# EAGLE board crystal-test-breakout (EAGLE 6.5.0)
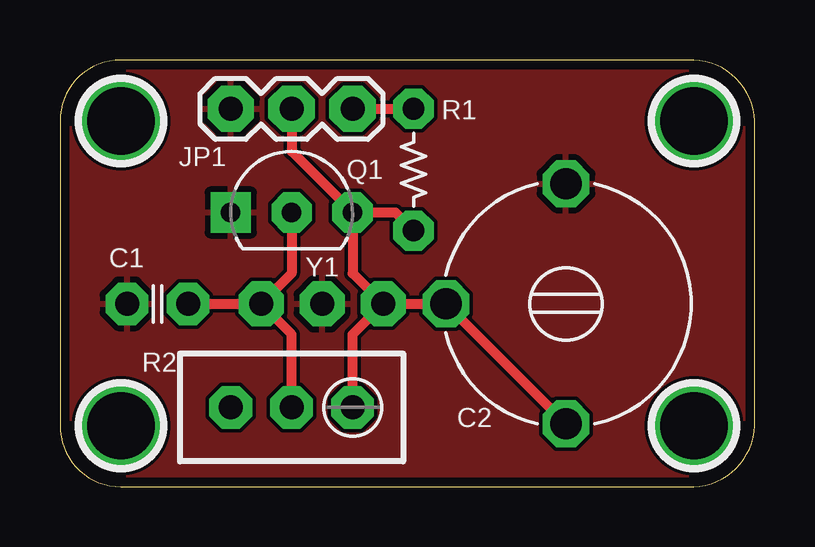
[diagram p0: board, top side]
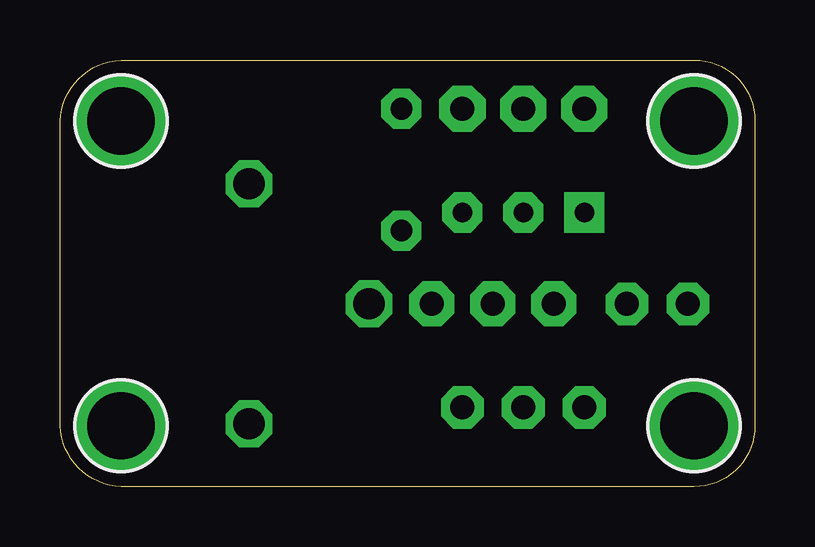
[diagram p1: board, bottom side, seen from below]

Size 28.96 x 17.78 mm. Coordinates in mm from the lower left corner, seen from the top.
Outline: 0,15.24 0,2.54 arc90 2.54,0 26.16,0 arc90 28.96,2.54 28.96,15.24 arc90 26.16,17.78 2.54,17.78 arc90 0,15.24
Copper layers (1*16): Top 0.0356mm / dielectric 1.5011mm / Bottom 0.0356mm
Design rules "LaenPCBOrder_2": minimum track width 6mil, minimum drill 13mil, track to track 6mil, track to pad 6mil, pad to pad 6mil, via to via 6mil, smd to smd 6mil, copper to edge 15mil, drill to drill 6mil, minimum pad ring 7mil, minimum via ring 7mil, stop-mask expansion 3mil, vias tented up to drill 20mil, thermal gap 10mil

## Footprints (pad centres in the part's own frame; a part is rotated, then mirrored left to right if it is on the bottom)
C025-025X050 = drill 1 pad 1.778 octagon: 1 -1.27,0; 2 1.27,0
GYC40000 = drill 1.3 octagon: P$1 -5,0; P$2 0,-5; P$3 5,0
HOLE-#2 = drill 2.8 pad 3.81: P$1 0,0
1X03 = drill 1 pad 1.93 octagon: 1 0,0; 2 2.54,0; 3 5.08,0
TO-92-AMMO = drill 0.813 pad 1.676 square: 1 -2.54,0 | drill 0.813 pad 1.676 octagon: 2 0,0; 3 2.54,0
RESISTOR-AXIAL-PTH-5.08MM = drill 0.9 pad 1.676 octagon: P$1 -2.54,0; P$2 2.54,0
RTRIM3296W = drill 1 pad 1.778 octagon: 1 -2.54,0; 2 0,0; 3 2.54,0
RESONATOR-PTH = drill 1 pad 1.88 octagon: 1 -2.54,0; 2 0,0; 3 2.54,0

## Placement (x,y rotation side)
C1  [C025-025X050]  4.06,7.62 180 top
C2  [GYC40000]  21.08,7.62 270 top
H1  HOLE#2  [HOLE-#2]  2.54,15.24 0 top
H2  HOLE#2  [HOLE-#2]  26.42,15.24 0 top
H3  HOLE#2  [HOLE-#2]  2.54,2.54 0 top
H4  HOLE#2  [HOLE-#2]  26.42,2.54 0 top
JP1  [1X03]  12.19,15.75 180 top
Q1  1N3904  [TO-92-AMMO]  9.65,11.43 0 top
R1  [RESISTOR-AXIAL-PTH-5.08MM]  14.73,13.21 90 top
R2  [RTRIM3296W]  9.65,3.3 180 top
Y1  [RESONATOR-PTH]  10.92,7.62 0 top

## Library data of the parts
C1 C2 H1-H4 JP1 Q1 R1 R2 Y1 = A_butts

## Nets
GND: C1.2 C2.P$1 JP1.3 Q1.1 Y1.2
N$1: C1.1 Q1.2 R2.2 Y1.1
N$4: C2.P$2 C2.P$3 JP1.2 Q1.3 R1.P$1 R2.1 Y1.3
VCC: JP1.1 R1.P$2

## Tracks (layer width: path | path; a pad name or v marks a point on that pad's centre or on a via)
GND
  pour Top: 0,0 0,17.78 28.96,17.78 28.96,0
N$1
  Top 0.406: Q1.2 9.65,8.89 Y1.1 | R2.2 9.65,6.35 Y1.1 | C1.1 Y1.1
N$4
  Top 0.406: Q1.3 12.19,8.89 Y1.3 | Y1.3 C2.P$2 C2.P$3 | R2.1 12.19,6.35 Y1.3 | JP1.2 9.65,13.97 Q1.3 | Q1.3 13.97,11.43 R1.P$1
VCC
  Top 0.406: JP1.1 R1.P$2